# Altium PCB PT-MIS-PCB-008_v1 PCB.PcbDoc
Units mil, origin at the board's own origin, x right, y up, seen from the top; angles counter-clockwise.
Board outline 3267.72 x 3937.01 mil, 2 copper layers (Top Layer, Bottom Layer), stack 62.192 mil thick; 10 components, 5 nets, 36 pads, 42 vias.
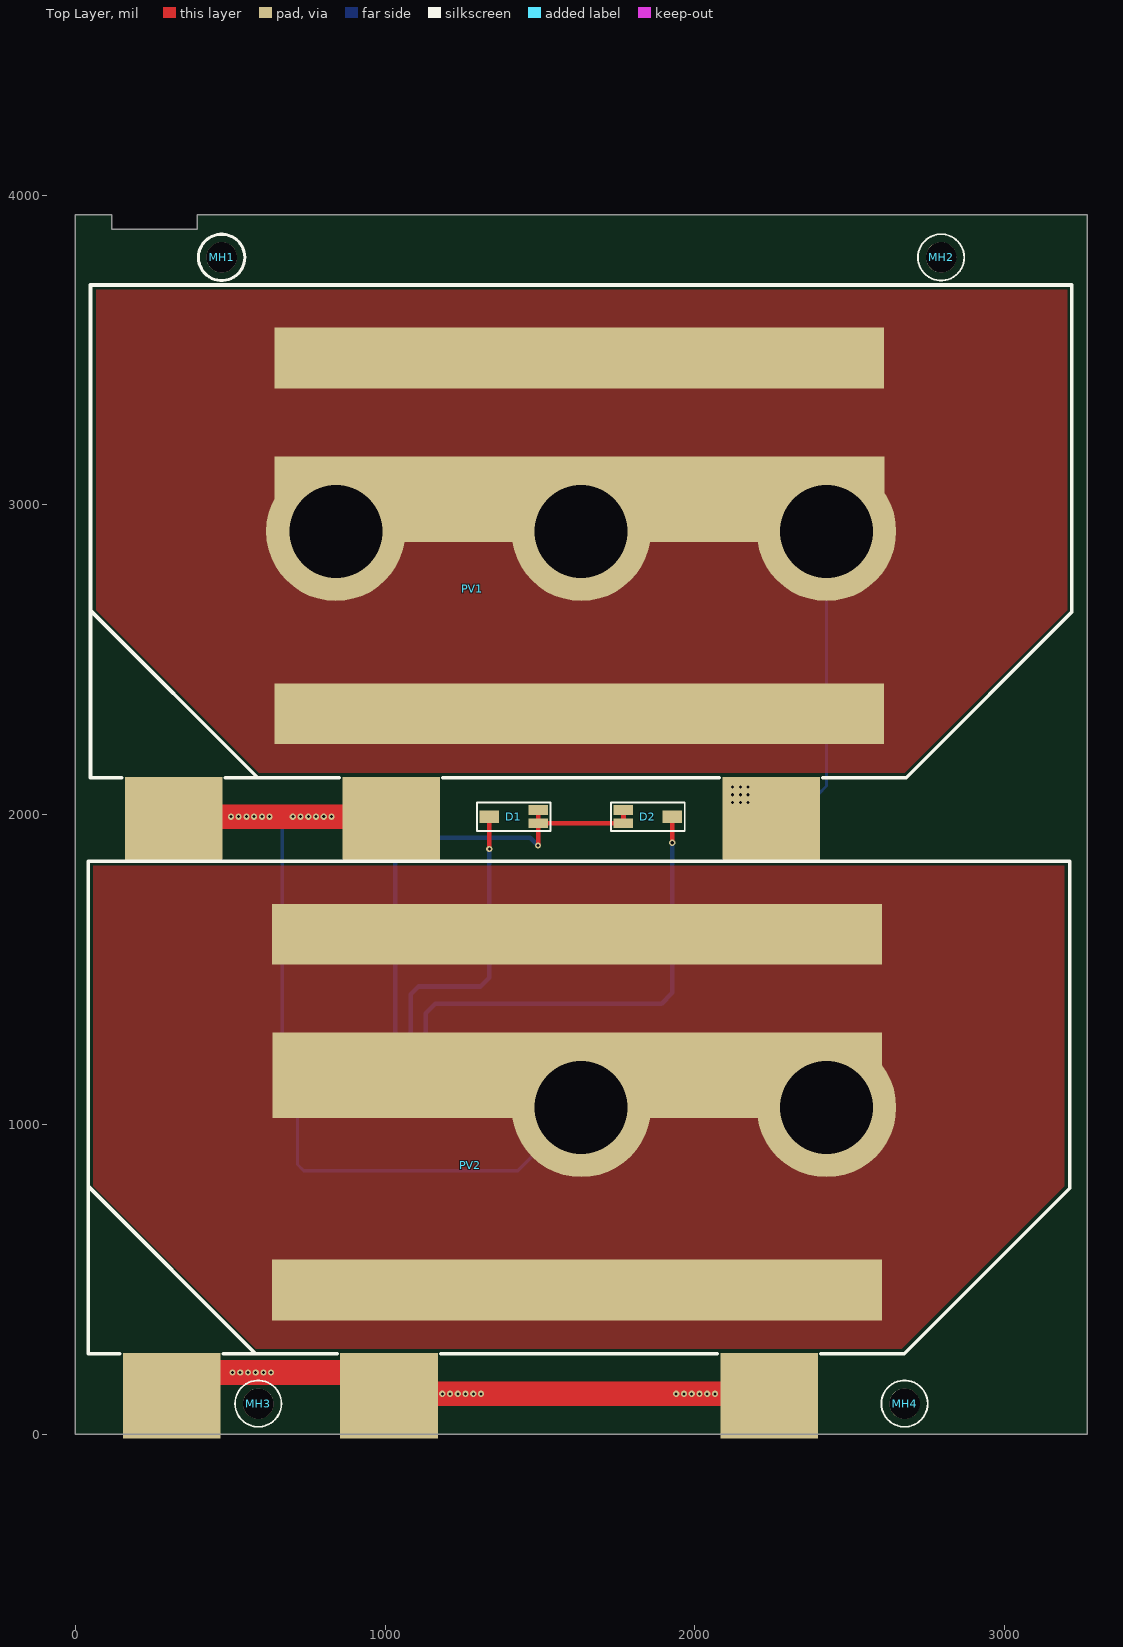
[diagram p0: Top Layer view]
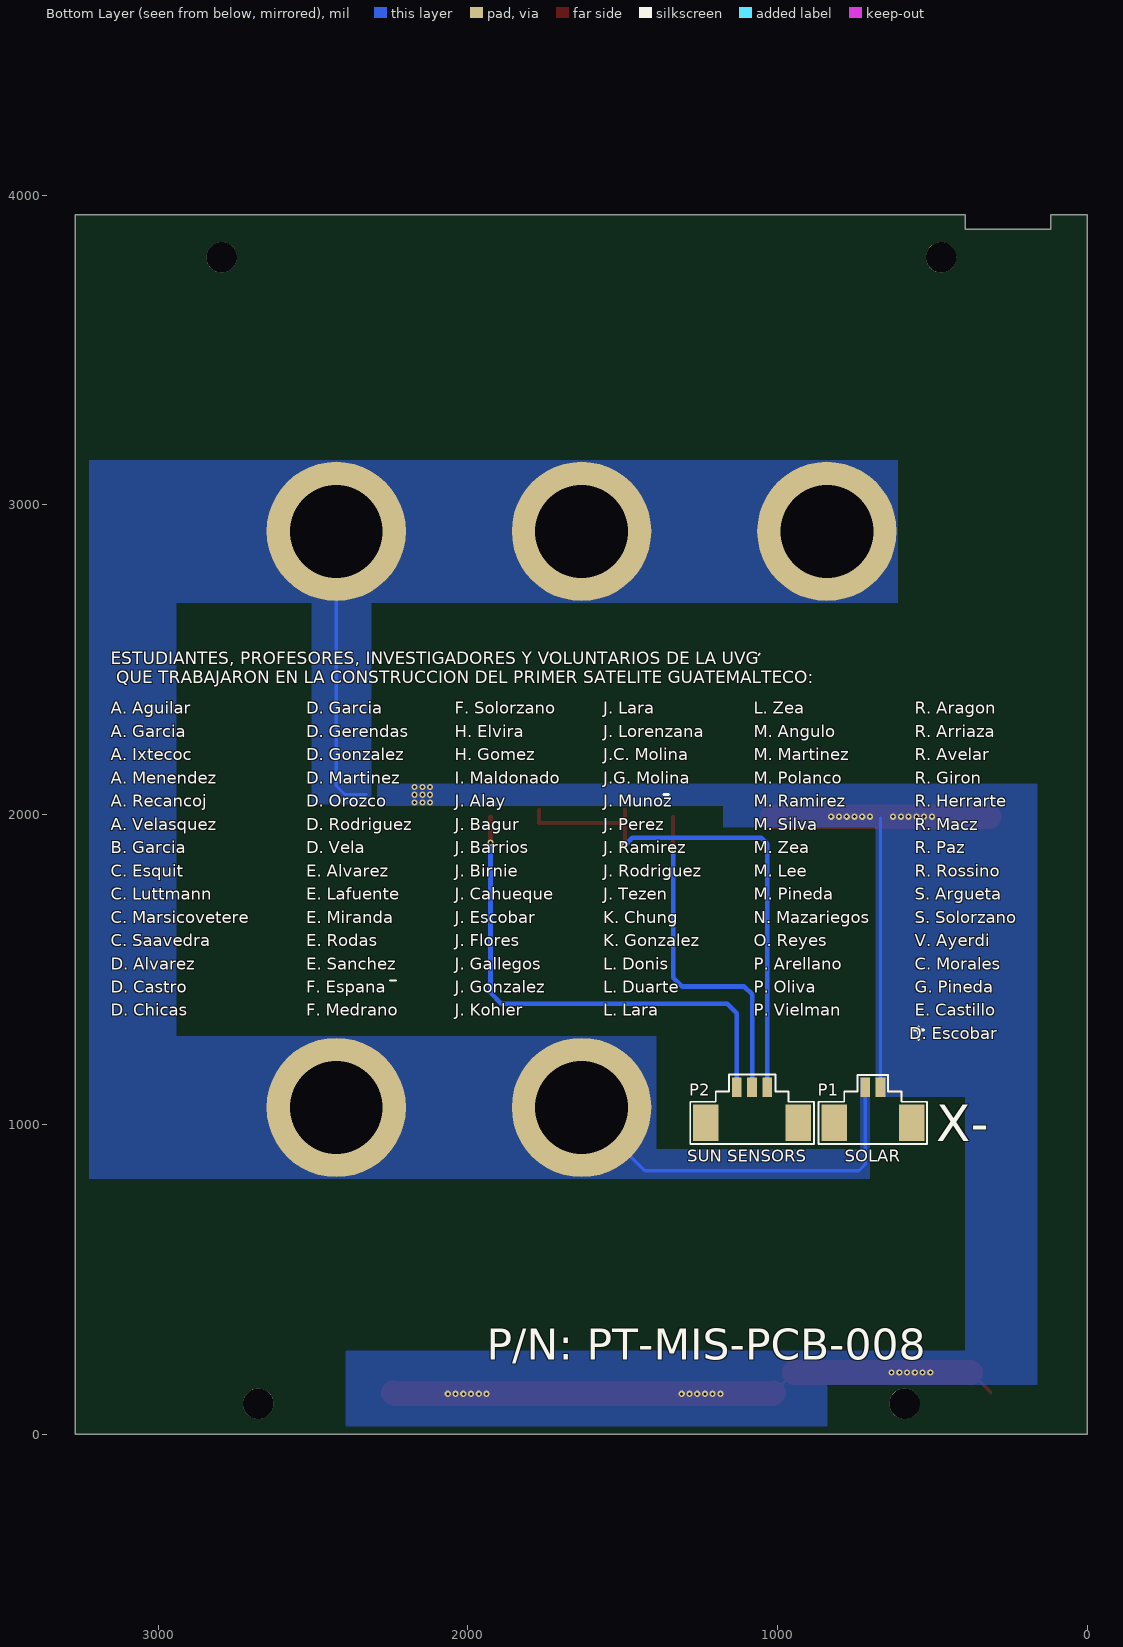
[diagram p1: Bottom Layer view, seen from below]
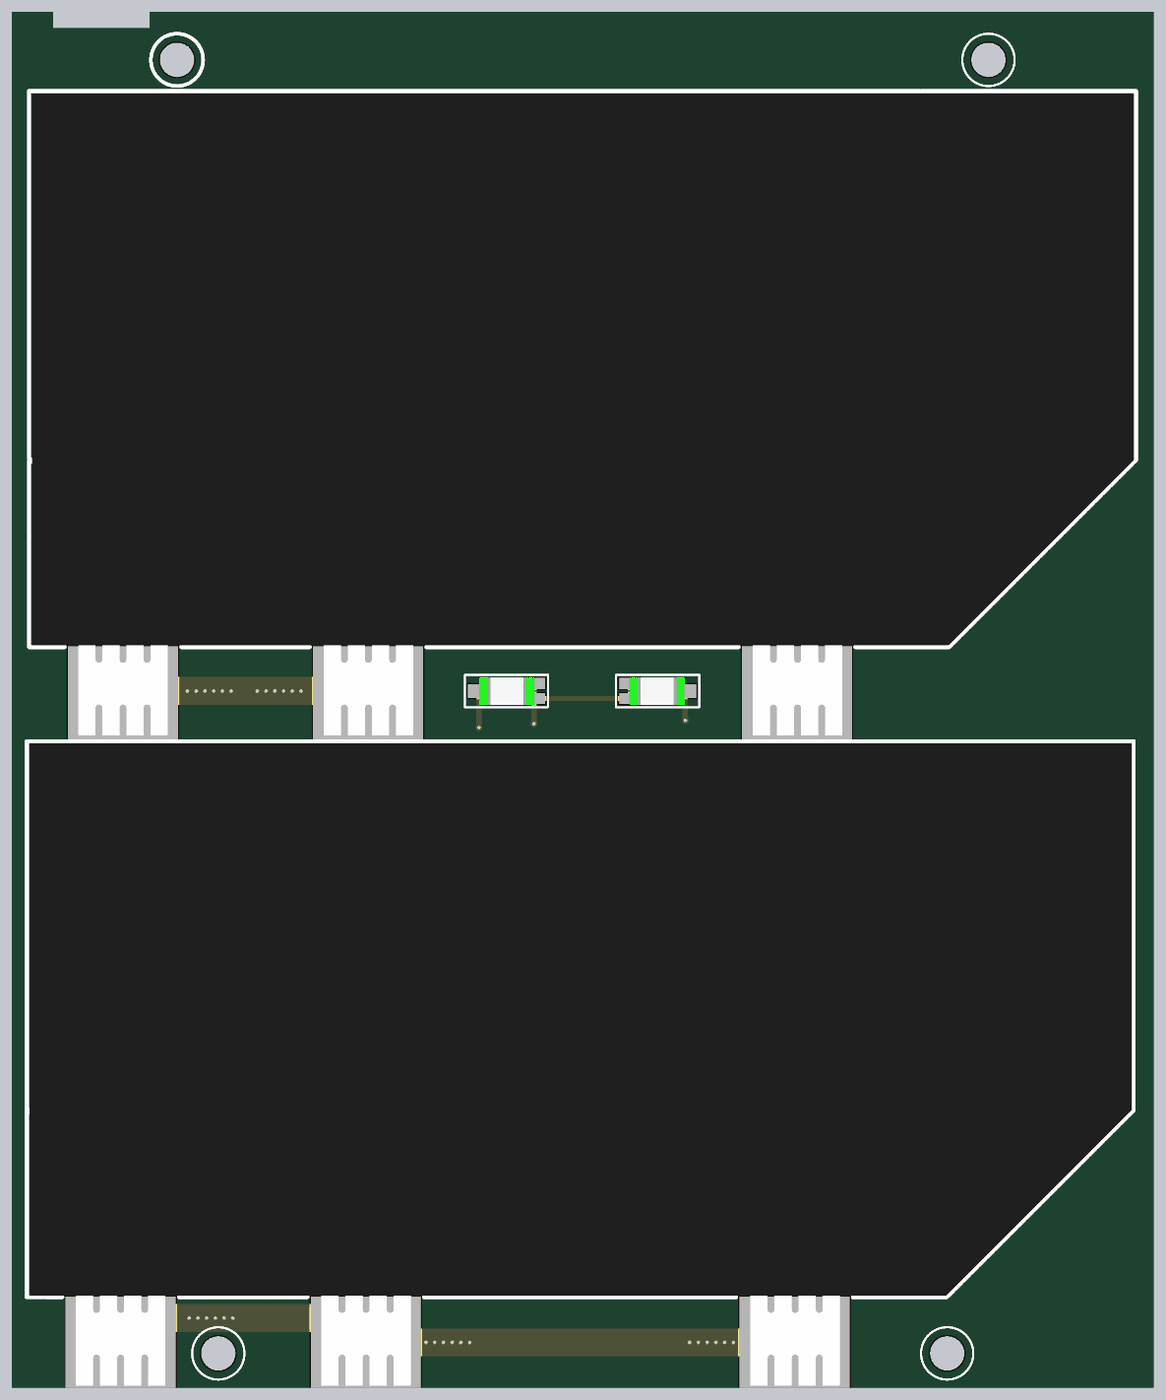
[diagram p2: 3D render of the assembled board from above, using the file's embedded part models]

## Layer stack, top to bottom
Top Solder: solder mask 0.4, Solder Resist, Dk 3.5
Top Layer: signal copper 1.4
Dielectric 1: dielectric 59.3921, FR-4, Dk 4.8
Bottom Layer: signal copper 1.4
Bottom Solder: solder mask 0.4, Solder Resist, Dk 3.5

## Board outline
0,0 0,3937.01 118.11,3937.01 118.11,3889.76 393.7,3889.76 393.7,3937.01 3267.72,3937.01 3267.72,0

## Design rules (kind name [scope] priority, off if disabled: settings)
Clearance [All] p1: gap=10 ignorepadtopadclearanceinfootprint=FALSE except(0: Arc-Hole Track-Hole SMDPad-Hole THPad-Hole Via-Hole Fill-Hole Poly-Hole Region-Hole Text-Hole)
PolygonConnect [All] p1: connectstyle=Direct reliefconductorwidth=10 reliefentries=4 polygonreliefangle="90 Angle" airgapwidth=10
RoutingVias [All] p1: holewidth=28 width=50 viastyle="Through Hole" minholewidth=28 minwidth=50 maxholewidth=28 maxwidth=50
SolderMaskExpansion [All] p1: expansion=4
Width [All] p1: maxlimit=100 minlimit=10 preferedwidth=10
30 further rules are at their usual default settings.

## Classes and differential pairs
component class "[03] - SCHEMATIC": D1 D2 MH1 MH2 MH3 MH4 P1 P2 PV2

## Components (designator, comment, footprint, x,y, rotation, side; value= is the part's Value field where it differs from the comment)
D1 "TEMD6010FX01" TEMD6010FX01 1414.49,1993.5 r180 top
D2 "TEMD6010FX01" TEMD6010FX01 1849.49,1993.5 r0 top
MH1 "MH_3.8MMNC_2.5MMD" MH_3.8MMNC_2MMD_NON_COPPER_NPTH 472.44,3799.21 r0 top
MH2 "MH_3.8MMNC_2.5MMD" MH_3.8MMNC_2MMD_NON_COPPER_NPTH 2795.27,3799.21 r0 top
MH3 "MH_3.8MMNC_2.5MMD" MH_3.8MMNC_2MMD_NON_COPPER_NPTH 590.55,98.43 r0 top
MH4 "MH_3.8MMNC_2.5MMD" MH_3.8MMNC_2MMD_NON_COPPER_NPTH 2677.17,98.43 r0 top
P1 "0533980271" 0533980271 692.72,1062.09 r180 bottom
P2 "0533980371" 0533980371 1082.72,1062.09 r180 bottom
PV1 "AZUR SPACE 3G30A" "AZUR SPACE 3G30A" 1627.7,3018.82 r180 top
PV2 "AZUR SPACE 3G30A" "AZUR SPACE 3G30A" 1620.92,1158.82 r180 top

## Footprints (in the part's own frame and the unit in brackets; to place one, negate y for a bottom-side part, rotate by r counter-clockwise, add the part's x,y. Pads: shape width x height; smd on the part's side, far side on the other; paste and mask are expansions set on the pad)
0533980271 [mm] "CONN HEADER 2POS 1.25MM VERT SMD"
  rect 2.1x3 smd: 0(-3.175,-1.45) 0(3.175,-1.45)
  rect 0.8x1.6 smd: 1(-0.625,1.45) 2(0.625,1.45)
  silkscreen extent -4.45,-3.17 4.45,2.48, body extent -3.82,-2.72 3.83,1.48, height 4.71
0533980371 [mm] "CONN HEADER 3POS 1.25MM VERT SMD"
  rect 2.1x3 smd: 0(-3.8,-1.45) 0(3.8,-1.45)
  rect 0.8x1.6 smd: 1(-1.25,1.45) 2(0,1.45) 3(1.25,1.45)
  silkscreen extent -5.07,-3.18 5.07,2.53, body extent -4.45,-2.67 4.45,1.53, height 4.68
"AZUR SPACE 3G30A" [mm] "30% Triple Junction GaAs Solar Cell Assembly"
  rect 50x7 smd: 1(0,0)
  rect 50x5 smd: 1(0.026,17.602) 1(0.026,-11.557)
  rect 8x7 smd: 2(-15.727,26.297) 2(15.448,26.297) 3(33.273,26.297)
  silkscreen extent -40.38,-17.55 40.1,22.85, body extent -40.25,-17.41 39.9,29.27, height 0.31
MH_3.8MMNC_2MMD_NON_COPPER_NPTH [mm] "Mounting Hole 3.8mm Diameter (Non Copper), 2mm Drill NPTH"
  round 2.5 hole 2.5 unplated: 1(0,0)
  silkscreen extent -1.9,-1.9 1.9,1.9
TEMD6010FX01 [mm]
  rect 1.6x0.8 smd: 1(-2.025,-0.55) 1(-2.025,0.55)
  rect 1.6x1 smd: 2(1.975,0)
  silkscreen extent -3.05,-1.17 3,1.18, body extent -2.07,-1 1.93,1, height 1.01

## Part data
D1 D2: "Ambient Light Sensor", Current - Dark (Typ)=2nA, Manufacturer="Vishay Semiconductors", Operating Temperature="-40°C ~ 100°C", Standard Package=3,000, Supplier Part Number 1=751-1051-1-ND, Voltage - DC Reverse (Vr) (Max)=16V, Active Area=0.27mm², Catalog Drawings=TEMx60x0(F)X01, Category="Sensors, Transducers", ComponentLink1Description=https://datasheet.ciiva.com/8280/temd6010-8280593.pdf, ComponentLink1URL=https://datasheet.ciiva.com/8280/temd6010-8280593.pdf, ComponentLink2Description=https://datasheet.ciiva.com/1252/temd6010-1252130.pdf, ComponentLink2URL=https://datasheet.ciiva.com/1252/temd6010-1252130.pdf, ComponentLink3Description=https://datasheet.ciiva.com/2819/temd6010-2819730.pdf, ComponentLink3URL=https://datasheet.ciiva.com/2819/temd6010-2819730.pdf, ComponentLink4Description=https://datasheet.ciiva.com/2819/temd6010-2819731.pdf, ComponentLink4URL=https://datasheet.ciiva.com/2819/temd6010-2819731.pdf, ComponentLink5Description=https://datasheet.ciiva.com/2819/temd6010-2819732.pdf, ComponentLink5URL=https://datasheet.ciiva.com/2819/temd6010-2819732.pdf, ComponentLink6Description=https://datasheet.ciiva.com/4270/temd6010-4270070.pdf, ComponentLink6URL=https://datasheet.ciiva.com/4270/temd6010-4270070.pdf, ComponentLink7Description=https://datasheet.ciiva.com/46430/1794172-46430214.pdf, ComponentLink7URL=https://datasheet.ciiva.com/46430/1794172-46430214.pdf, ComponentLink8Description=https://datasheet.ciiva.com/1249/temd6010-1249179.pdf, ComponentLink8URL=https://datasheet.ciiva.com/1249/temd6010-1249179.pdf, ComponentLink9Description=https://datasheet.ciiva.com/4697/temd6010-102586-4697659.pdf, ComponentLink9URL=https://datasheet.ciiva.com/4697/temd6010-102586-4697659.pdf, Diode Type=PIN, Family="Optical Sensors - Photodiodes", Featured Product="Surface-Mount Ambient Light Sensing Photodiodes", Manufacturer Part Number=TEMD6010FX01, Mounting Type="Surface Mount", Online Catalog="Ambient Light Sensor", Other Names=751-1051-2, Packaging="Tape & Reel (TR)", Pricing 1="1=2.26, 10=1.998, 25=1.4824, 100=1.2892, 250=1.1603, 500=1.0314, 1000=0.8863 (USD)", Product Training Modules="Ambient Light Sensors", Spectral Range="430nm ~ 610nm", Stock 1=29, Supplier 1=Digi-Key, Viewing Angle=120°, Wavelength=540nm
MH1 MH2 MH3 MH4: library part MH_3.8MMNC_2MMD, "Mounting Hole 3.8mm Diameter (Non Copper), 2.5mm Drill NPTH"
P1: "2 Positions Header, Shrouded Connector 0.049\" (1.25mm) Surface Mount, Right Angle Tin", Color=Natural, Manufacturer=Molex, Supplier Part Number 1=WM7606CT-ND, Category="Connectors, Interconnects", ComponentLink1Description=https://datasheet.ciiva.com/6813/533980271-sd-6813860.pdf, ComponentLink1URL=https://datasheet.ciiva.com/6813/533980271-sd-6813860.pdf, ComponentLink2Description=https://datasheet.ciiva.com/3117/0533980271-pcb-headers-3117624.pdf, ComponentLink2URL=https://datasheet.ciiva.com/3117/0533980271-pcb-headers-3117624.pdf, ComponentLink3Description=https://datasheet.ciiva.com/3117/0533980271-pcb-headers-3117625.pdf, ComponentLink3URL=https://datasheet.ciiva.com/3117/0533980271-pcb-headers-3117625.pdf, ComponentLink4Description=https://datasheet.ciiva.com/6813/533980271-sd-6813869.pdf, ComponentLink4URL=https://datasheet.ciiva.com/6813/533980271-sd-6813869.pdf, Connector Type="Header, Shrouded", Contact Finish=Tin, Contact Finish Thickness="39µin (1.00µm)", Contact Mating Length=-, Contact Type="Blade Pin", Family="Rectangular Connectors - Headers, Male Pins", Fastening Type=-, Features="Solder Retention", Manufacturer Part Number=0533980271, Mounting Type="Surface Mount", Number of Positions=2, Number of Positions Loaded=All, Number of Rows=1, Packaging="Cut Tape (CT)", Pitch="0.049\" (1.25mm)", Pricing 1="1=0.88, 10=0.778, 100=0.6713, 500=0.5493 (USD)", Row Spacing=-, Series="PicoBlade™ 53398", Stock 1=25214, Supplier 1=Digi-Key, Termination=Solder
P2: "3 Positions Header, Shrouded Connector 0.049\" (1.25mm) Surface Mount Tin", Color=Natural, Manufacturer=Molex, Supplier Part Number 1=WM7607CT-ND, Category="Connectors, Interconnects", ComponentLink1Description=https://datasheet.ciiva.com/6813/533980271-sd-6813860.pdf, ComponentLink1URL=https://datasheet.ciiva.com/6813/533980271-sd-6813860.pdf, ComponentLink2Description=https://datasheet.ciiva.com/3117/0533980371-pcb-headers-3117626.pdf, ComponentLink2URL=https://datasheet.ciiva.com/3117/0533980371-pcb-headers-3117626.pdf, ComponentLink3Description=https://datasheet.ciiva.com/3117/0533980371-pcb-headers-3117627.pdf, ComponentLink3URL=https://datasheet.ciiva.com/3117/0533980371-pcb-headers-3117627.pdf, Connector Type="Header, Shrouded", Contact Finish=Tin, Contact Finish Thickness="39µin (1.00µm)", Contact Mating Length=-, Contact Type="Blade Pin", Family="Rectangular Connectors - Headers, Male Pins", Fastening Type=-, Features="Solder Retention", Manufacturer Part Number=0533980371, Mounting Type="Surface Mount", Number of Positions=3, Number of Positions Loaded=All, Number of Rows=1, Packaging=Digi-Reel®, Pitch="0.049\" (1.25mm)", Pricing 1="1=1.07, 10=0.942, 100=0.8126, 500=0.6649 (USD)", Row Spacing=-, Series="PicoBlade™ 53398", Stock 1=26974, Supplier 1=Digi-Key, Termination=Solder
PV1 PV2: "30% Triple Junction GaAs Solar Cell Assembly", Current at max. Power="502.9 mA", Voltage at max.Power="2409 mV", Average Efficiency (1353 W/m^2)=29.6, Average Efficiency (1367 W/m^2)=29.3, Average Open Circuit (BOL)="2690 mV", Average Short Circuit (BOL)="519.6 mA"

## Free pads (board coordinates)
  round 450 hole 300: 2(841.12,2914.63) 2(1633.23,1054.63) 2(1633.23,2914.63) 2(2425.31,1054.61) 2(2425.33,2914.63)

## Via types
v1: diameter 20, hole 10, Top Layer to Bottom Layer, tented both sides, 42 vias

## Nets (pads, with @x,y where several pads share a name; then routed paths per layer and width w, separated by ;. In a path a pad name is that pad's centre, name@x,y a point inside that pad or via, vN(x,y) a via of type N, cw(c..) or ccw(c..) an arc to the next point about the centre after c; other vN are vias at no path point)
2.35V: P1.1 pad.2 PV1.1 PV2.1 | length 2187.7
  Bottom Layer w10: P1.1 717.32,870.39 737.32,850.39 1429,850.39 pad.2@1633.23,1054.63 ; 2328.46,2065.59 2398.48,2065.59 2425.33,2092.44 pad.2@2425.33,2914.63
GND: P1.2 PV1.2 PV1.3 PV2.2 PV2.3 | length 3559.6
  Top Layer w10: PV2.3@310.94,133.5 PV2.3@376.79,199.35 ; PV2.2@946.87,199.35 PV2.2@1012.72,133.5
  Top Layer w80: PV1.3@317.72,1993.5 v1(502.24,1993.5) v1(527.24,1993.5) v1(552.24,1993.5) v1(577.24,1993.5) v1(602.24,1993.5) v1(627.24,1993.5) v1(702.24,1993.5) v1(727.24,1993.5) v1(752.24,1993.5) v1(777.24,1993.5) v1(802.24,1993.5) v1(827.24,1993.5) PV1.2@1019.49,1993.5 ; PV2.3@376.79,199.35 v1(507.24,199.35) v1(532.24,199.35) v1(557.24,199.35) v1(582.24,199.35) v1(607.24,199.35) v1(632.24,199.35) PV2.2@946.87,199.35 ; PV2.2@1012.72,133.5 1016.22,130 v1(1185,130) v1(1210,130) v1(1235,130) v1(1260,130) v1(1285,130) v1(1310,130) v1(1940,130) v1(1965,130) v1(1990,130) v1(2015,130) v1(2040,130) v1(2065,130) 2236.57,130 PV2.2@2240.08,133.5
  Bottom Layer w10: P1.2 668.11,1990.39
  other v1: 2122.24,2039.35 2147.24,2039.35 2172.24,2039.35 2122.24,2064.35 2147.24,2064.35 2172.24,2064.35 2122.24,2089.35 2147.24,2089.35 2172.24,2089.35
NetD1_1: D1.1 D2.1 P2.3 | length 1699.7
  Top Layer w15: v1(1494.21,1900) D1.1@1494.21,1971.85 ; D1.1@1494.21,2015.16 D1.1@1494.21,1971.85 ; D2.1@1769.76,2015.16 1769.76,1971.85 D1.1@1494.21,1971.85
  Bottom Layer w15: P2.3 1033.5,1905.79 1052.72,1925 1469.21,1925 v1(1494.21,1900)
NetD1_2: D1.2 P2.2 | length 1096.7
  Top Layer w15: v1(1336.73,1889.02) D1.2
  Bottom Layer w15: P2.2 1082.72,1420 1107.72,1445 1307.72,1445 1336.73,1474.02 v1(1336.73,1889.02)
NetD2_2: D2.2 P2.1 | length 1631.4
  Top Layer w15: v1(1927.24,1909.35) D2.2
  Bottom Layer w15: P2.1 1131.93,1359.21 1162.72,1390 1892.72,1390 1927.24,1424.53 v1(1927.24,1909.35)
pads on no net: MH1.1 MH2.1 MH3.1 MH4.1 P1.0 P2.0

## Polygon pours and split planes (outlines as drawn)
2.35V on Top Layer "Bottom Layer-No Net 1" (solid, remove dead copper, pour order 56): 67.72,3695 67.72,2660 592.72,2135 2677.72,2135 2702.72,2160 3202.72,2660 3202.72,3695
2.35V on Top Layer "Bottom Layer-No Net 1" (solid, remove dead copper, pour order 54): 57.72,1835 57.72,800 582.72,275 2667.72,275 3192.72,800 3192.72,1835
2.35V on Bottom Layer "Bottom Layer-No Net 1" (solid, remove dead copper, pour order 52): 1392.72,824.35 1392.72,920 732.72,920 732.72,1150 702.72,1150 702.72,824.35
GND on Bottom Layer "Bottom Layer-No Net 1" (solid, remove dead copper, pour order 50): 682.72,1090 392.72,1090 392.72,1960 682.72,1960
2.35V on Bottom Layer "Bottom Layer-No Net 1" (solid, pour order 26): 3222.24,1279.35 2942.24,1279.35 2942.24,2694.35 3222.24,2694.35
2.35V on Bottom Layer "Bottom Layer-No Net 1" (solid, remove dead copper, pour order 24): 612.24,3144.35 612.24,2684.35 3222.24,2684.35 3222.24,3144.35
GND on Bottom Layer "Bottom Layer-No Net 1" (solid, remove dead copper, pour order 28): 1175,2029.35 1175,1959.35 162.24,1959.35 162.24,2029.35
GND on Bottom Layer "Bottom Layer-No Net 1" (solid, remove dead copper, pour order 30): 2292.24,2099.35 162.24,2099.35 162.24,1959.35 847.24,1959.35 847.24,2029.35 2292.24,2029.35
2.35V on Bottom Layer "Bottom Layer-No Net 1" (solid, remove dead copper, pour order 32): 2312.24,2099.35 2312.24,2684.35 2505,2684.35 2505,2034.35 2312.24,2034.35
GND on Bottom Layer "Bottom Layer-No Net 1" (solid, remove dead copper, pour order 34): 2395,269.35 2395,159.35 162.24,159.35 162.24,269.35
GND on Bottom Layer "Bottom Layer-No Net 1" (solid, pour order 36): 162.24,1969.35 393.7,1969.35 393.7,229.35 162.24,229.35
GND on Bottom Layer "Bottom Layer-No Net 1" (solid, pour order 48): 840,160 840,25 2395,25 2395,159.35
2.35V on Bottom Layer "Bottom Layer-No Net 1" (solid, remove dead copper, pour order 18): 1392.72,1284.35 1392.72,824.35 3222.24,824.35 3222.24,1284.35

## Silkscreen, mask and mechanical layers (free items; w line width, h text height)
Top Overlay:
  circle w10: c472.44,3799.21 r74.8
Bottom Overlay:
  lines w5.91: 1057.72,2520 1062.72,2515 ; 1732.72,2520 1737.72,2515 ; 2232.72,1465 2252.72,1465
  lines w10: 530,1305 560,1305 ; 545,1275 545,1315 ; 1352.72,2065 1367.72,2065
  text "ESTUDIANTES, PROFESORES, INVESTIGADORES Y VOLUNTARIOS DE LA UVG /  QUE TRABAJARON EN LA CONSTRUCCION DEL PRIMER SATELITE GUATEMALTECO:" at 3152.72,2425 h40
  text "R. Aragon" at 557.72,2325 h39.37
  text "L. Zea" at 1077.72,2325 h39.37
  text "J. Lara" at 1562.72,2325 h39.37
  text "F. Solorzano" at 2042.72,2325 h39.37
  text "D. Garcia" at 2522.72,2325 h39.37
  text "A. Aguilar" at 3152.72,2325 h39.37
  text "R. Arriaza" at 557.72,2250 h39.37
  text "M. Angulo" at 1077.72,2250 h39.37
  text "J. Lorenzana" at 1562.72,2250 h39.37
  text "H. Elvira" at 2042.72,2250 h39.37
  text "D. Gerendas" at 2522.72,2250 h39.37
  text "A. Garcia" at 3152.72,2250 h39.37
  text "R. Avelar" at 557.72,2175 h39.37
  text "M. Martinez" at 1077.72,2175 h39.37
  text "J.C. Molina" at 1562.72,2175 h39.37
  text "H. Gomez" at 2042.72,2175 h39.37
  text "D. Gonzalez" at 2522.72,2175 h39.37
  text "A. Ixtecoc" at 3152.72,2175 h39.37
  text "R. Giron" at 557.72,2100 h39.37
  text "M. Polanco" at 1077.72,2100 h39.37
  text "J.G. Molina" at 1562.72,2100 h39.37
  text "I. Maldonado" at 2042.72,2100 h39.37
  text "D. Martinez" at 2522.72,2100 h39.37
  text "A. Menendez" at 3152.72,2100 h39.37
  text "R. Herrarte" at 557.72,2025 h39.37
  text "M. Ramirez" at 1077.72,2025 h39.37
  text "J. Munoz" at 1562.72,2025 h39.37
  text "J. Alay" at 2042.72,2025 h39.37
  text "D. Orozco" at 2522.72,2025 h39.37
  text "A. Recancoj" at 3152.72,2025 h39.37
  text "R. Macz" at 557.72,1950 h39.37
  text "M. Silva" at 1077.72,1950 h39.37
  text "J. Perez" at 1562.72,1950 h39.37
  text "J. Bagur" at 2042.72,1950 h39.37
  text "D. Rodriguez" at 2522.72,1950 h39.37
  text "A. Velasquez" at 3152.72,1950 h39.37
  text "R. Paz" at 557.72,1875 h39.37
  text "M. Zea" at 1077.72,1875 h39.37
  text "J. Ramirez" at 1562.72,1875 h39.37
  text "J. Barrios" at 2042.72,1875 h39.37
  text "D. Vela" at 2522.72,1875 h39.37
  text "B. Garcia" at 3152.72,1875 h39.37
  text "R. Rossino" at 557.72,1800 h39.37
  text "M. Lee" at 1077.72,1800 h39.37
  text "J. Rodriguez" at 1562.72,1800 h39.37
  text "J. Birnie" at 2042.72,1800 h39.37
  text "E. Alvarez" at 2522.72,1800 h39.37
  text "C. Esquit" at 3152.72,1800 h39.37
  text "S. Argueta" at 557.72,1725 h39.37
  text "M. Pineda" at 1077.72,1725 h39.37
  text "J. Tezen" at 1562.72,1725 h39.37
  text "J. Cahueque" at 2042.72,1725 h39.37
  text "E. Lafuente" at 2522.72,1725 h39.37
  text "C. Luttmann" at 3152.72,1725 h39.37
  text "S. Solorzano" at 557.72,1650 h39.37
  text "N. Mazariegos" at 1077.72,1650 h39.37
  text "K. Chung" at 1562.72,1650 h39.37
  text "J. Escobar" at 2042.72,1650 h39.37
  text "E. Miranda" at 2522.72,1650 h39.37
  text "C. Marsicovetere" at 3152.72,1650 h39.37
  text "V. Ayerdi" at 557.72,1575 h39.37
  text "O. Reyes" at 1077.72,1575 h39.37
  text "K. Gonzalez" at 1562.72,1575 h39.37
  text "J. Flores" at 2042.72,1575 h39.37
  text "E. Rodas" at 2522.72,1575 h39.37
  text "C. Saavedra" at 3152.72,1575 h39.37
  text "C. Morales" at 557.72,1500 h39.37
  text "P. Arellano" at 1077.72,1500 h39.37
  text "L. Donis" at 1562.72,1500 h39.37
  text "J. Gallegos" at 2042.72,1500 h39.37
  text "E. Sanchez" at 2522.72,1500 h39.37
  text "D. Alvarez" at 3152.72,1500 h39.37
  text "G. Pineda" at 557.72,1425 h39.37
  text "P. Oliva" at 1077.72,1425 h39.37
  text "L. Duarte" at 1562.72,1425 h39.37
  text "J. Gonzalez" at 2042.72,1425 h39.37
  text "F. Espana" at 2522.72,1425 h39.37
  text "D. Castro" at 3152.72,1425 h39.37
  text "E. Castillo" at 557.72,1350 h39.37
  text "P. Vielman" at 1077.72,1350 h39.37
  text "L. Lara" at 1562.72,1350 h39.37
  text "J. Kohler" at 2042.72,1350 h39.37
  text "F. Medrano" at 2522.72,1350 h39.37
  text "D. Chicas" at 3152.72,1350 h39.37
  text "D. Escobar" at 575,1275 h39.37
  text "X-" at 487.72,945 h118.11
  text "SOLAR" at 782.72,880 h39.37
  text "SUN SENSORS" at 1292.72,880 h39.37
  text "P/N: PT-MIS-PCB-008" at 1939.17,239.5 h100
Mechanical Drawing:
  circle w10: c2677.16,100.43 r47.86
  circle w10: c590.55,100.43 r49.47
  circle w10: c472.44,3801.22 r48.77
  circle w10: c2795.27,3801.22 r50.06
  lines w5.91: 0,0 3267.72,0 3267.72,3937.01 393.7,3937.01 393.7,3889.76 118.11,3889.76 118.11,3937.01 0,3937.01 0,0
  text "Mechanical Drawing of PT-MIS-PCB-008_v1" at 515,4180 h60
  text "Units: mm" at -645,-350 h60
  text "Scale: 1:1" at -645,-450 h60
Board Outline:
  the board outline again, w5.91
ASM Top:
  text "Assembly TOP of PT-MIS-PCB-008_v1" at 700,3972.01 h60
ASM Bottom:
  text "Assembly BOTTOM of PT-MIS-PCB-008_v1" at 610,4077.01 h60

## Dimensions
590.55,92.99 to 0,0 on Mechanical Drawing
118.11,3937.01 to 393.7,3937.01 on Mechanical Drawing
118.11,3937.01 to 118.11,3889.76 on Mechanical Drawing
2677.16,85 to 590.55,80 on Mechanical Drawing
590.55,50.96 to 0,0 on Mechanical Drawing
0,0 to 3267.72,0 on Mechanical Drawing
0,0 to 0,3937.01 on Mechanical Drawing